# Altium PCB 8051_MOV.PcbDoc
Units mil, origin at the board's own origin, x right, y up, seen from the top; angles counter-clockwise.
Board outline 8390.03 x 3020.03 mil, 2 copper layers (Top Layer, Bottom Layer); 55 components, 98 nets, 419 pads, 0 vias.
Unrouted connection lines stored in the file: 43.
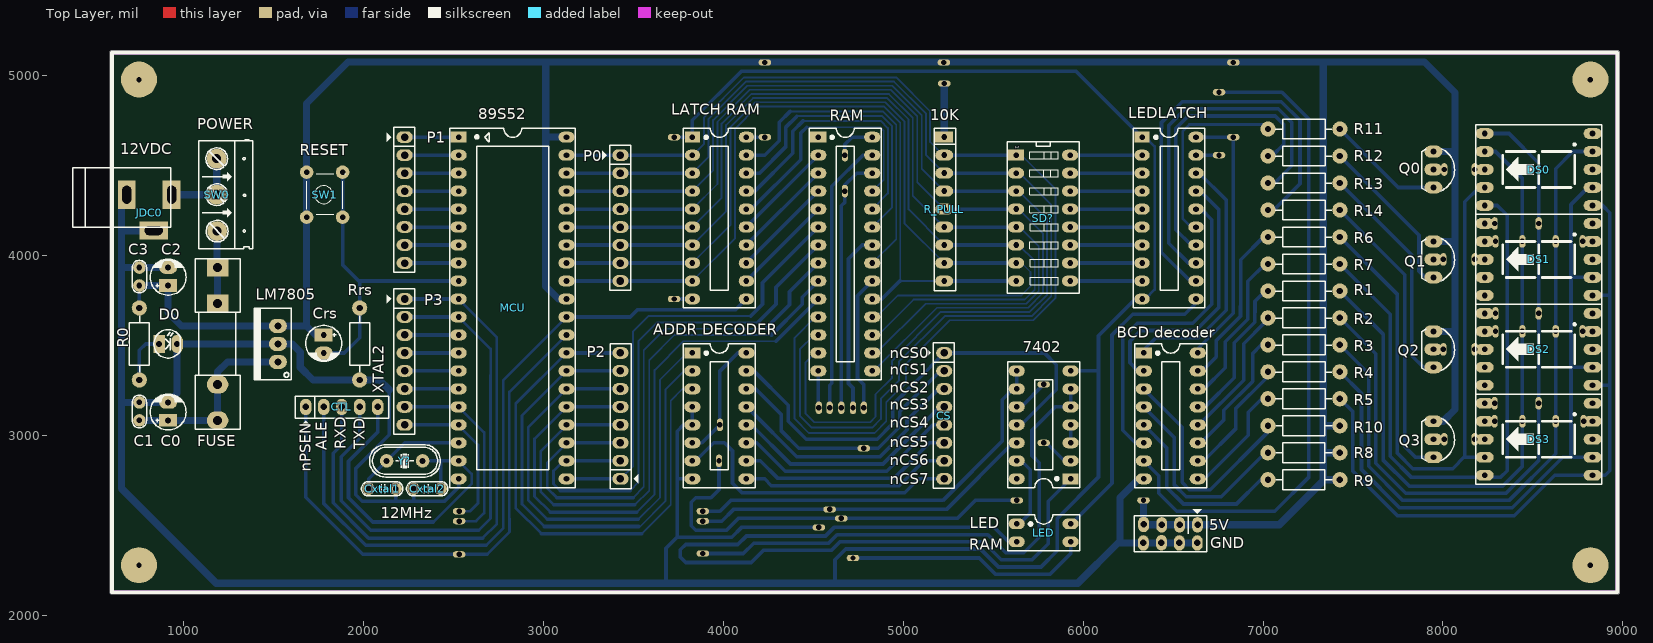
[diagram p0: Top Layer view]
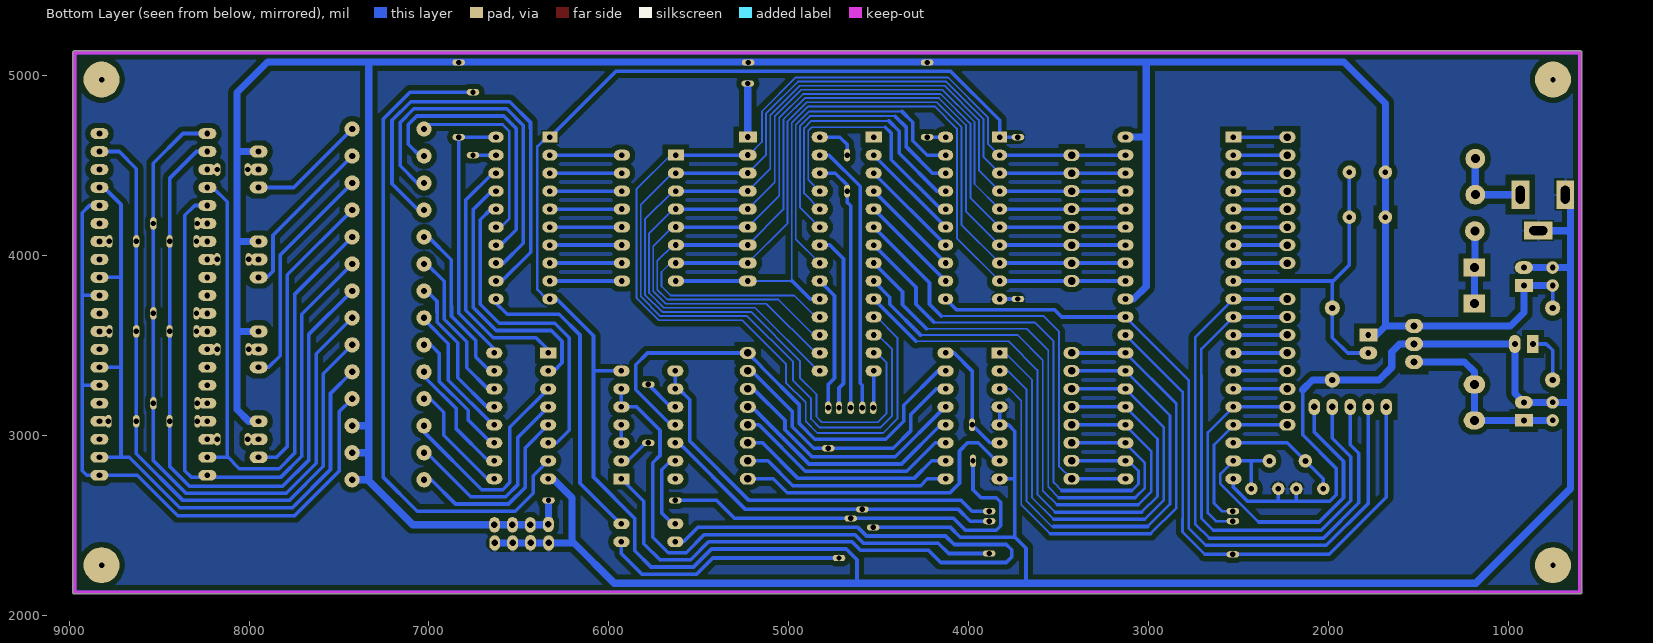
[diagram p1: Bottom Layer view, seen from below]
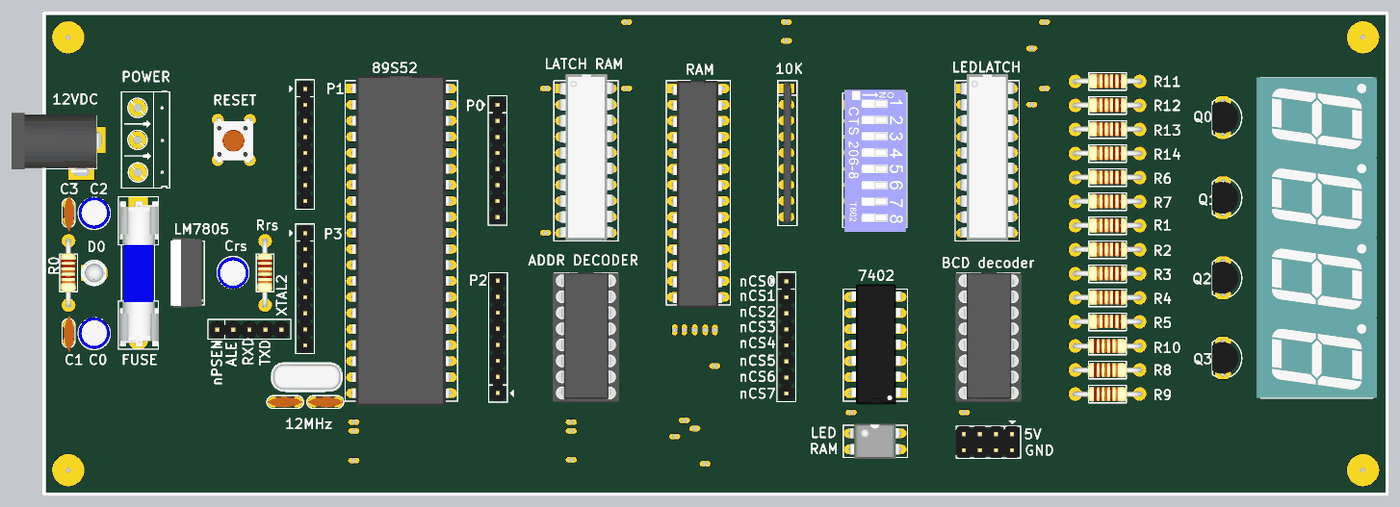
[diagram p2: 3D render of the assembled board from above, using the file's embedded part models]

## Layer stack, top to bottom
Top Solder: solder mask 0.4, Solder Resist, Dk 3.5
Top Layer: signal copper 1.4
Dielectric 1: dielectric 12.6, FR-4, Dk 4.8
Bottom Layer: signal copper 1.4
Bottom Solder: solder mask 0.4, Solder Resist, Dk 3.5

## Board outline
600,2119.99 cw(c600,2130) 589.99,2130 589.99,5130 cw(c600,5130) 600,5140.02 8970,5140.02 cw(c8970,5130) 8980.01,5130 8980.01,2130 cw(c8970,2130) 8970,2119.99

## Design rules (kind name [scope] priority, off if disabled: settings)
Clearance [All] p1: gap=13 ignorepadtopadclearanceinfootprint=FALSE except(0: Arc-Hole Track-Hole SMDPad-Hole THPad-Hole Via-Hole Fill-Hole Poly-Hole Region-Hole Text-Hole)
PolygonConnect [All] p1: connectstyle=Relief reliefconductorwidth=10 reliefentries=4 polygonreliefangle="90 Angle" airgapwidth=10
RoutingVias [All] p1: holewidth=28 width=50 viastyle="Through Hole" minholewidth=28 minwidth=50 maxholewidth=28 maxwidth=50
SolderMaskExpansion [All] p1: expansion=4
Width [All] p1: maxlimit=40 minlimit=10 preferedwidth=20
30 further rules are at their usual default settings.

## Components (designator, comment, footprint, x,y, rotation, side; value= is the part's Value field where it differs from the comment)
5V "Header 4X2" JP4x2 6485,2455 r180 top (schematic designator P10)
7402 "NORx4" DIP14/W0.3 5930,2760 r90 top
"ADDR DECODER" "74138" DIP16/W0.3 3827,3460 r270 top
"BCD decoder" "7447" DIP16/W0.3 6337,3460 r270 top
C0 "Cap Pol" CP1/2 912,3085 r90 top
C1 "Cap Non-Pol" CN1 752,3185 r270 top
C2 "Cap Pol" CP1/2 912,3835 r90 top
C3 "Cap Non-Pol" CN1 752,3935 r270 top
Crs "Cap Pol1" CP1/2 1777,3560 r270 top
CS "HEADER4" JP8 5227,3460 r270 top
CTL "HEADER5" JP5 1677,3160 r0 top
Cxtal1 "Cap" CN1.5 2177,2705 r180 top
Cxtal2 "Cap" CN1.5 2277,2705 r0 top
D0 "LED" LED-3mm 862,3510 r0 top
DS0 "7SEG S" 7SEGS 8832,4280 r90 top
DS1 "7SEG S" 7SEGS 8832,3780 r90 top
DS2 "7SEG S" 7SEGS 8832,3280 r90 top
DS3 "7SEG S" 7SEGS 8832,2780 r90 top
FUSE "Fuse" FUSE 1187,3510 r270 top
JDC0 "Jack DC" DC-IN 807,4240 r0 top
"LATCH RAM" "74HC573" DIP20/W0.3 3827,4660 r270 top
LED "SW - DIP2" DIP4/W0.3 5630,2510 r270 top (schematic designator SD)
LEDLATCH "74HC573" DIP20/W0.3 6327,4660 r270 top
LM7805 "LM7805" QTO-220 1522,3410 r90 top
MCU "AT89S52" DIP40/W0.6 2527,4660 r270 top
P0 "HEADER0" JP8 3427,4560 r270 top
P1 "HEADER1" JP8 2227,4660 r270 top
P2 "HEADER2" JP8 3427,2760 r90 top
P3 "HEADER3" JP8 2227,3760 r270 top
Q0 "A1015" QTO-92 7947,4480 r270 top
Q1 "A1015" QTO-92 7947,3980 r270 top
Q2 "A1015" QTO-92 7947,3480 r270 top
Q3 "A1015" QTO-92 7947,2980 r270 top
R0 "RESISTOR" "RES 1/2W" 752,3310 r90 top
R1 "RESISTOR" "RES 1/2W" 7027,3805 r0 top
R2 "RESISTOR" "RES 1/2W" 7027,3655 r0 top
R3 "RESISTOR" "RES 1/2W" 7027,3505 r0 top
R4 "RESISTOR" "RES 1/2W" 7027,3355 r0 top
R5 "RESISTOR" "RES 1/2W" 7027,3205 r0 top
R6 "RESISTOR" "RES 1/2W" 7027,4105 r0 top
R7 "RESISTOR" "RES 1/2W" 7027,3955 r0 top
R8 "RESISTOR" "RES 1/2W" 7427,2905 r180 top
R9 "RESISTOR" "RES 1/2W" 7427,2755 r180 top
R10 "RESISTOR" "RES 1/2W" 7427,3055 r180 top
R11 "RESISTOR" "RES 1/2W" 7027,4705 r0 top
R12 "RESISTOR" "RES 1/2W" 7027,4555 r0 top
R13 "RESISTOR" "RES 1/2W" 7027,4405 r0 top
R14 "RESISTOR" "RES 1/2W" 7027,4255 r0 top
R_PULL "10K" RN8 5227,4660 r270 top
RAM "DIP28" DIP28/W0.3 4527,4660 r270 top
Rrs "Res1" "RES 1/2W" 1977,3310 r90 top
SD? "SW - DIP8" DIP16/W0.3K 5627,4560 r270 top
SW0 "" HED3 1182,4540 r270 top
SW1 "SW" "Tact SW 4 pin" 1682,4215 r90 top
Y? "XTAL" XT2 2227,2860 r180 top

## Footprints (in the part's own frame and the unit in brackets; to place one, negate y for a bottom-side part, rotate by r counter-clockwise, add the part's x,y. Pads: shape width x height; smd on the part's side, far side on the other; paste and mask are expansions set on the pad)
7SEGS [mil] "DIP 10 Leads; Body 12 x 15 mm; Pitch 0.5 mm"
  oval 60x100 hole 32: 1(0,0) 2(100,0) 3(200,0) 4(300,0) 5(400,0) 6(400,600) 7(300,600) 8(200,600) 9(100,600) 10(0,600)
  silkscreen extent -50,-50 450,650, body extent -50,-75 450,675, height 316
CN1 [mil]
  round 70 hole 31: 1(0,0) 2(100,0)
  silkscreen extent -40,-40 141,40, body extent -60,-30 170,37, height 265
CN1.5 [mil]
  round 70 hole 31: 1(0,0) 2(150,0)
  silkscreen extent -40,-40 190,40, body extent -40,-33 190,33, height 235
CP1/2 [mil] "Tu hoa < 22uF/16>50V"
  rect 70x100 hole 32: 1(0,0)
  oval 70x100 hole 32: 2(100,0)
  silkscreen extent -53,-100 146,100, body extent -49,-99 149,99, height 287
DC-IN [mil] "Jac DC input"
  rect 100x160 hole 50 slot 100 at 90 deg: 1(125,100) 2(-125,100)
  rect 160x100 hole 50 slot 100 at 0 deg: 3(25,-100)
  silkscreen extent -425,-80 120,250, body extent -410,-105 134,269, height 434
DIP4/W0.3 [mil] "4 PIN, W 300mil, Pin to pin 100mil"
  oval 60x90 hole 31: 1(0,0) 2(100,0) 3(100,300) 4(0,300)
  silkscreen extent -50,-50 150,350, body extent -59,-10 159,305, height 170
DIP14/W0.3 [mil] "14PIN, W 300mil, Pin to pin 100mil"
  rect 60x90 hole 31: 1(0,0)
  oval 60x90 hole 31: 2(100,0) 3(200,0) 4(300,0) 5(400,0) 6(500,0) 7(600,0) 8(600,300) 9(500,300) 10(400,300) 11(300,300) 12(200,300) 13(100,300) 14(0,300)
  silkscreen extent -50,-50 650,350, body extent -70,-12 680,302, height 145
DIP16/W0.3 [mil] "16 PIN, W 300mil, Pin to pin 100mil"
  rect 60x90 hole 31: 1(0,0)
  oval 60x90 hole 31: 2(100,0) 3(200,0) 4(300,0) 5(400,0) 6(500,0) 7(600,0) 8(700,0) 9(700,300) 10(600,300) 11(500,300) 12(400,300) 13(300,300) 14(200,300) 15(100,300) 16(0,300)
  silkscreen extent -50,-50 750,350, body extent -52,-57 752,356, height 299
DIP16/W0.3K [mil] "16 PIN, W 300mil, Pin to pin 100mil For Switch"
  rect 60x90 hole 31.5: 1(0,0)
  oval 60x90 hole 31.5: 2(100,0) 3(200,0) 4(300,0) 5(400,0) 6(500,0) 7(600,0) 8(700,0) 9(700,300) 10(600,300) 11(500,300) 12(400,300) 13(300,300) 14(200,300) 15(100,300) 16(0,300)
  silkscreen extent -74,-50 767,350, body extent -93,-40 793,345, height 325
DIP20/W0.3 [mil] "DIP 20, 20 PIN, W 300mil, Pin to pin 100mil"
  rect 60x85 hole 31: 1(0,0)
  oval 60x85 hole 31: 2(100,0) 3(200,0) 4(300,0) 5(400,0) 6(500,0) 7(600,0) 8(700,0) 9(800,0) 10(900,0) 11(900,300) 12(800,300) 13(700,300) 14(600,300) 15(500,300) 16(400,300) 17(300,300) 18(200,300) 19(100,300) 20(0,300)
  silkscreen extent -50,-50 950,350, body extent -91,-18 945,322, height 155
DIP28/W0.3 [mil] "28 PIN, W 300mil, Pin to pin 100mil"
  rect 60x90 hole 31: 1(0,0)
  oval 60x90 hole 31: 2(100,0) 3(200,0) 4(300,0) 5(400,0) 6(500,0) 7(600,0) 8(700,0) 9(800,0) 10(900,0) 11(1000,0) 12(1100,0) 13(1200,0) 14(1300,0) 15(1300,300) 16(1200,300) 17(1100,300) 18(1000,300) 19(900,300) 20(800,300) 21(700,300) 22(600,300) 23(500,300) 24(400,300) 25(300,300) 26(200,300) 27(100,300) 28(0,300)
  silkscreen extent -50,-50 1350,350, body extent -50,-10 1367,300, height 200
DIP40/W0.6 [mil] "40 PIN, W 600mil, Pin to pin 100mil"
  rect 60x90 hole 31: 1(0,0)
  oval 60x90 hole 31: 2(100,0) 3(200,0) 4(300,0) 5(400,0) 6(500,0) 7(600,0) 8(700,0) 9(800,0) 10(900,0) 11(1000,0) 12(1100,0) 13(1200,0) 14(1300,0) 15(1400,0) 16(1500,0) 17(1600,0) 18(1700,0) 19(1800,0) 20(1900,0) 21(1900,600) 22(1800,600) 23(1700,600) 24(1600,600) 25(1500,600) 26(1400,600) 27(1300,600) 28(1200,600) 29(1100,600) 30(1000,600) 31(900,600) 32(800,600) 33(700,600) 34(600,600) 35(500,600) 36(400,600) 37(300,600) 38(200,600) 39(100,600) 40(0,600)
  silkscreen extent -50,-50 1950,650, body extent -82,-10 1982,600, height 224
FUSE [mil] "De Fuse"
  rect 100x120 hole 50: 1(-425,0) 1(-225,0)
  oval 100x120 hole 50: 2(225,0) 2(425,0)
  silkscreen extent -475,-125 475,125, body extent -448,-117 459,127, height 378
HED3 [mil] "Header 3, 3 pin, hight 300mil, Pin to Pin 200, Colour Green"
  round 110 hole 50: 1(0,0) 2(200,0) 3(402.62,2.62)
  silkscreen extent -106,-100 500,200
JP4x2 [mil] "Connector 4x2"
  oval 60x86 hole 36: 1(-150.5,-49.5) 2(-50.5,-49.5) 3(48.5,-49.5) 4(149.5,-51.5) 5(-149.5,51.5) 6(-49.5,51.5) 7(50,50) 8(150.5,51.5)
  silkscreen extent -200,-135 200,101, body extent -197,-100 203,100, height 335
JP5 [mil] "JP5"
  oval 65x90 hole 36: 1(0,0) 2(100,0) 3(200,0) 4(300,0) 5(400,0)
  silkscreen extent -57,-101 461,60, body extent -48,-53 448,45, height 323
JP8 [mil] "JP8"
  oval 65x90 hole 42: 1(0,0) 2(100,0) 3(200,0) 4(300,0) 5(400,0) 6(500,0) 7(600,0) 8(700,0)
  silkscreen extent -56,-100 752,57, body extent -48,-50 748,48, height 323
LED-3mm [mil] "LED 2 PIN, 3ly Only colour"
  rect 65x100 hole 32: 1(0,0)
  oval 65x100 hole 32: 2(100,0)
  silkscreen extent -29,-78 118,79, body extent -25,-75 113,75, height 217
QTO-92 [mil] "TO-92"
  oval 66x100 hole 32: 1(-100,0) 2(0,0) 3(100,0)
  silkscreen extent -117,-65 120,118, body extent -109,-66 109,95, height 245
QTO-220 [mil] "TO-220 - 1-2-3"
  oval 80x100 hole 39: 1(0,0) 2(100,0) 3(200,0)
  silkscreen extent -100,-76 300,130, body extent -119,-64 322,121, height 755
"RES 1/2W" [mil] "R 1/2W, 2 pin, 300mil"
  round 85 hole 35: 1(0,0) 2(400,0)
  silkscreen extent 42,-55 356,55, body extent -12,-45 414,49, height 91
RN8 [mil] "R SIP8, 9 Pin"
  rect 60x100 hole 32: 1(0,0)
  oval 60x100 hole 32: 2(100,0) 3(200,0) 4(300,0) 5(400,0) 6(500,0) 7(600,0) 8(700,0) 9(800,0)
  silkscreen extent -50,-55 855,65, body extent -43,-20 843,29, height 219
"Tact SW 4 pin" [mil] "SW button 4pin, 250 x250 mil"
  round 75 hole 31: 1(0,0) 2(250,-200) 3(250,0) 4(0,-200)
  silkscreen extent 15,-215 240,0, body extent -36,-220 276,24, height 276
XT2 [mil] "Footpin for Crystal 2 pin"
  round 75 hole 34: 1(-100,0) 2(100,0)
  silkscreen extent -198,-90 195,90, body extent -233,-93 213,90, height 138

## Part data
5V: "Header, 4-Pin, Dual row"
7402: library part DIP14, "DIP14"
"ADDR DECODER": "3 -to- 8 Decoder - Out Low"
"BCD decoder": "BCD to 7-Segment Decoder/Driver"
C0 C2 Crs: "Polarized Capacitor (Radial)"
C1 C3 Cxtal1 Cxtal2: "Capacitor"
CS: library part MHDR1X8, "Header, 8-Pin"
CTL: library part "Header 5H", "Header, 5-Pin, Right Angle"
DS0 DS1 DS2 DS3: library part LED7S, "Single 7 Seg Dipslay"
JDC0: "Jack DC input"
"LATCH RAM" LEDLATCH: library part 74573, "Octal D-Type Latch with 3-State Output Non-Inverting"
LED: library part SWDIP-2, "DIP Switch, 2 Position, SPST"
LM7805: "Positive Voltage Regulator"
MCU: "AT89S52, 8k Byte Flash Memory , 40 Pin"
P0 P1 P2 P3: library part "Header 8", "Header, 8-Pin"
Q0 Q1 Q2 Q3: "PNP Bipolar Transistor"
R0 R1 R2 R3 R4 R5 R6 R7 R8 R9 R10 R11 R12 R13 R14 Rrs: "Resistor"
R_PULL: library part RKC8LD, "Resistor Pack 4x2"
SD?: library part SWDIP-8, "DIP Switch, 8 Position, SPST"
SW0: library part Hed3, "Header 3 (Green)"
SW1: library part "Tact SW - 4Pin", "Switch button 4 pin"
Y?: "Crystal Oscillator"

## Free pads (board coordinates)
  oval 35x70 hole 30: 2(8177,2980) 3(8007,2980) 4(8177,3480) 5(8002,3480) 6(8177,3980) 7(8002,3980) 8(8777,4080) 10(8777,3580) 12(8782,3080) 14(8287,4180) 16(8292,4080) 20(8532,4180) 21(8442,4080) 24(8627,4080) 25(8627,3580) 26(8627,3080) 27(8292,3680) 28(8532,3680) 29(8292,3580) 30(8442,3580) 31(8287,3180) 32(8532,3180) 33(8287,3080) 34(8442,3080) 35(8007,4480) 36(8177,4480) 48(4675,4560) 49(4675,4360) 50(4530,3155) 51(4590,3155) 52(4655,3155) 53(4720,3155) 54(4780,3155) 65(3975,2860) 66(3980,3060)
  oval 70x35 hole 30: 39(2530,2580) 40(2530,2525) 41(2530,2340) 42(6755,4560) 43(6755,4910) 44(6834.5,4660) 45(6835,5075) 46(4230,4660) 47(4230,5075) 55(4780,2930) 56(3885,2580) 57(3885,2525) 58(3885,2345) 59(4590,2590) 60(5780,3285) 61(5780,2960) 62(4655,2540) 63(4720,2320) 64(4530,2490) 67(3725,4660) 68(3725,3760) 69(5227,4958) 70(5225,5075) 75(5630,2640) 76(6335,2640)
  round 200 hole 30: 71(8820,4980) 72(8820,2280) 73(750,2280) 74(750,4980)

## Nets (pads, with @x,y where several pads share a name; then routed paths per layer and width w, separated by ;. In a path a pad name is that pad's centre, name@x,y a point inside that pad or via, vN(x,y) a via of type N, cw(c..) or ccw(c..) an arc to the next point about the centre after c; other vN are vias at no path point)
5V: 5V.1 5V.2 5V.3 5V.4 7402.14 "ADDR DECODER.6" "ADDR DECODER.16" "BCD decoder.16" "LATCH RAM.20" C2.1 C3.2 Crs.1 LEDLATCH.20 LM7805.3 MCU.31 MCU.40 pad.44 pad.45 pad.46 pad.47 pad.48 pad.49 pad.52 pad.62 pad.65 pad.66 pad.69 pad.70 pad.75 pad.76 Q0.1 Q1.1 Q2.1 Q3.1 R0.2 R8.1 R9.1 R10.1 R_PULL.1 RAM.26 RAM.28 SW1.1 SW1.3 | length 23297.1
  Bottom Layer w20: R0.2 C3.2 ; 3827,2960 3880,2960 pad.66 3980,3360 4080,3460 4127,3460 ; pad.65@3975,2855 3975,2700 3930,2655 3845,2655 3820,2630 3820,2500 3845,2475 4016.57,2475 4081.57,2540 pad.62 ; 4127,4660 pad.46 ; pad.52@4655,3150.43 pad.52 4655,4278 4675,4298 pad.49 ; pad.62@4665,2540 5300,2540 5400,2640 pad.75 ; pad.49@4675,4375 4675,4395 4740,4460 RAM.26 ; pad.48 4675,4620 4715,4660 RAM.28 ; LEDLATCH.20 pad.44 6834.5,3680.77 6637,3483.27 6637,3460
  Bottom Layer w40: C3.2 C2.1 912,3685 987,3610 LM7805.3 1682,3610 ; Crs.1 1769.5,3552.5 1739.5,3552.5 1682,3610 ; 3012,5075 3012,4660 ; MCU.31 3082,3760 3012,3830 3012,4660 ; MCU.40 3012,4660 ; R_PULL.1 pad.69 ; pad.76 6335,2507 5V.4 6337.5,2504.5 5V.3 5V.2 5V.1 7089.5,2504.5 7335,2750 7335,2905 ; 7340,2755 R9.1 ; 7340,3055 R10.1 ; R8.1 7335,2905 ; Q3.1 8002,3080 8067,3145 8067,3580 ; Q2.1 8067,3580 ; Q1.1 8062,4080 ; Q0.1 8055,4580 ; 1682,3610 SW1.1 SW1.3 1682,4847 1912,5077 7335,5077 ; 7335,2905 7335,5077 ; 7335,5077 7898,5077 8067,4908 8067,3580
A: DS0.7 DS1.7 DS2.7 DS3.7 pad.16 pad.21 pad.29 pad.30 pad.33 pad.34 R1.2 | length 3792.2
  Bottom Layer w20: R1.2 7667,3565 7667,2865 7812,2720 8332,2720 8442,2830 pad.34 pad.30 pad.21 8442,4430 8292,4580 DS0.7
A8: MCU.21 P2.1 RAM.6 | length 2489.5
  Bottom Layer w10: P2.1 3497,2830 3497,3580 3582,3665 4152,3665
  Bottom Layer w20: MCU.21 P2.1 ; 4152,3665 4217,3730 4217,3850 RAM.6
A9: MCU.22 P2.2 RAM.7 | length 3036.4
  Bottom Layer w10: 3482,2695 3527,2740 3527,3525 3632,3630 4192,3630
  Bottom Layer w15: 3092,2695 3054.5,2732.5 3054.5,2804.5 3110,2860 MCU.22
  Bottom Layer w20: 3092,2695 3482,2695 ; MCU.22 P2.2 ; 4192,3630 4292,3730 4292,3825 RAM.7
A10: MCU.23 P2.3 RAM.8 | length 3146.5
  Bottom Layer w10: 3497,2655 3557,2715 3557,3475 3677,3595 4227,3595
  Bottom Layer w15: 3073.57,2655 3019.5,2709.07 3019.5,2848.82 3127,2956.32 MCU.23
  Bottom Layer w20: 3073.57,2655 3497,2655 ; MCU.23 P2.3 ; 4233.57,3595 4367,3728.43 4367,3800 RAM.8
A11: MCU.24 P2.4 RAM.9 | length 3267.9
  Bottom Layer w10: 3507,2615 3587,2695 3587,3420 3727,3560 4267,3560
  Bottom Layer w15: 3057,2615 2984.5,2687.5 2984.5,2913.82 3127,3056.32 MCU.24
  Bottom Layer w20: 3057,2615 3507,2615 ; MCU.24 P2.4 ; 4267,3560 4437,3730 4437,3770 RAM.9
A12: MCU.25 P2.5 RAM.10 | length 3394.8
  Bottom Layer w10: 3517,2575 3617,2675 3617,3365 3777,3525 4292,3525 ; RAM.10@4512,3760 RAM.10
  Bottom Layer w15: 3037,2575 2949.5,2662.5 2949.5,2982.5 MCU.25
  Bottom Layer w20: 3037,2575 3517,2575 ; MCU.25 P2.5 ; 4292,3525 RAM.10
A13: "ADDR DECODER.1" MCU.26 P2.6 | length 2730.2
  Bottom Layer w10: 3526.5,2535 3647,2655.5 3647,3310 3797,3460 3827,3460
  Bottom Layer w15: 3020.14,2535 2914.5,2640.64 2914.5,3047.5 MCU.26
  Bottom Layer w20: 3020.14,2535 3526.5,2535 ; MCU.26 P2.6
A14: "ADDR DECODER.2" MCU.27 P2.7 | length 2863.8
  Bottom Layer w10: 3528.92,2495 3537,2495 3677,2635 3677,3255 3782,3360 3827,3360
  Bottom Layer w15: 3003.57,2495 2879.5,2619.07 2879.5,3112.5 MCU.27
  Bottom Layer w20: 3003.57,2495 3528.92,2495 ; MCU.27 P2.7
A15: "ADDR DECODER.3" MCU.28 P2.8 | length 2994.2
  Bottom Layer w10: 3543.42,2460 3552,2460 3707,2615 3707,3195 3772,3260 3827,3260
  Bottom Layer w15: 2987,2455 2844.5,2597.5 2844.5,3177.5 MCU.28
  Bottom Layer w20: 2987,2455 3545.49,2455 ; MCU.28 P2.8
AD0: "LATCH RAM.2" LEDLATCH.2 MCU.39 P0.1 R_PULL.2 RAM.11 SD?.1 SD?.16 | length 6892.5
  Bottom Layer w10: 3827,4560 3827.78,4560 3892,4624.22 3892,4770 4114,4992 4960,4992 5148,4804 5148,4633.54 5221.54,4560 R_PULL.2 ; RAM.11 4510,3660 4395,3545 4395,3095 4475,3015 4839.85,3015 4905,3080.15 4905,3185.15 5015,3295.15 5015,3400 5257,3642 5722.16,3642 5845,3764.84 5845,4372 5657,4560 SD?.1
  Bottom Layer w20: MCU.39 P0.1 3827,4560 ; R_PULL.2 SD?.1 ; SD?.16 LEDLATCH.2
AD1: "LATCH RAM.3" LEDLATCH.3 MCU.38 P0.2 R_PULL.3 RAM.12 SD?.2 SD?.15 | length 6717.5
  Bottom Layer w10: 3827,4460 3917,4550 3917,4762.47 4123.53,4969 4948,4969 5125,4792 5125,4562 R_PULL.3 ; RAM.12 4505,3560 4425,3480 4425,3110 4490,3045 4827.43,3045 4875,3092.57 4875,3205 4975,3305 4975,3410 5230,3665 5712.63,3665 5822,3774.37 5822,4285 5647,4460 SD?.2
  Bottom Layer w20: MCU.38 P0.2 3827,4460 ; R_PULL.3 SD?.2 ; SD?.15 LEDLATCH.3
AD2: "LATCH RAM.4" LEDLATCH.4 MCU.37 P0.3 R_PULL.4 RAM.13 SD?.3 SD?.14 | length 6541.8
  Bottom Layer w10: 3827,4360 3942,4475 3942,4754.95 4133.05,4946 4938.47,4946 5102,4782.47 5102,4485 R_PULL.4 ; RAM.13 4510,3460 4455,3405 4455,3125 4505,3075 4815,3075 4845,3105 4845,3230 4937,3322 4937,3417 5208,3688 5703.11,3688 5799,3783.89 5799,4203 5642,4360 SD?.3
  Bottom Layer w20: MCU.37 P0.3 3827,4360 ; R_PULL.4 SD?.3 ; SD?.14 LEDLATCH.4
AD3: "LATCH RAM.5" LEDLATCH.5 MCU.36 P0.4 R_PULL.5 RAM.15 SD?.4 SD?.13 | length 5530.7
  Bottom Layer w10: 3827,4260 3966.5,4399.5 3966.5,4744.5 4145,4923 4928.95,4923 5077,4774.95 5077,4410 R_PULL.5 ; RAM.15 4836,3360 5187,3711 5693.58,3711 5776,3793.42 5776,4126 5642,4260 SD?.4
  Bottom Layer w20: MCU.36 P0.4 3827,4260 ; R_PULL.5 SD?.4 ; SD?.13 LEDLATCH.5
AD4: "LATCH RAM.6" LEDLATCH.6 MCU.35 P0.5 R_PULL.6 RAM.16 SD?.5 SD?.12 | length 5497
  Bottom Layer w10: 3827,4160 3989.5,4322.5 3989.5,4734.97 4154.53,4900 4919.42,4900 5052,4767.42 5052,4335 R_PULL.6 ; RAM.16 4850,3460 5124,3734 5684.05,3734 5753,3802.95 5753,4054 5647,4160 SD?.5
  Bottom Layer w20: MCU.35 P0.5 3827,4160 ; R_PULL.6 SD?.5 ; SD?.12 LEDLATCH.6
AD5: "LATCH RAM.7" LEDLATCH.7 MCU.34 P0.6 R_PULL.7 RAM.17 SD?.6 SD?.11 | length 5457.4
  Bottom Layer w10: 3827,4060 4014.5,4247.5 4014.5,4727.45 4164.05,4877 4909.89,4877 5029,4757.89 5029,4258 R_PULL.7 ; RAM.17 4860,3560 5057,3757 5674.53,3757 5730,3812.47 5730,3972 5642,4060 SD?.6
  Bottom Layer w20: MCU.34 P0.6 3827,4060 ; R_PULL.7 SD?.6 ; SD?.11 LEDLATCH.7
AD6: "LATCH RAM.8" LEDLATCH.8 MCU.33 P0.7 R_PULL.8 RAM.18 SD?.7 SD?.10 | length 5423.3
  Bottom Layer w10: 3827,3960 4039.5,4172.5 4039.5,4717.5 4176,4854 4900.37,4854 5006,4748.37 5006,4181 R_PULL.8 ; RAM.18 4850,3660 4970,3780 5657,3780 5707,3830 5707,3910 5657,3960 SD?.7
  Bottom Layer w20: MCU.33 P0.7 3827,3960 ; R_PULL.8 SD?.7 ; SD?.10 LEDLATCH.8
AD7: "LATCH RAM.9" LEDLATCH.9 MCU.32 P0.8 R_PULL.9 RAM.19 SD?.8 SD?.9 | length 4774
  Bottom Layer w10: 3827,3860 4064.5,4097.5 4064.5,4707.5 4188,4831 4890.84,4831 4983,4738.84 4983,3860 R_PULL.9
  Bottom Layer w20: MCU.32 P0.8 3827,3860 ; RAM.19 4880,3760 4980,3860 4983,3860 ; R_PULL.9 SD?.8 ; SD?.9 LEDLATCH.9
AD_0: "LATCH RAM.19" RAM.21 | length 1844.9
  Bottom Layer w10: 4374,4803 4886.31,4803 4960,4729.31 4960,4093 RAM.21
  Bottom Layer w20: 4127,4560 4230,4560 4310,4640 4310,4743 4370,4803
AD_1: "LATCH RAM.18" RAM.23 | length 1634.4
  Bottom Layer w10: 4407,4775 4410,4778 4878.78,4778 4937,4719.78 4937,4270 RAM.23
  Bottom Layer w20: 4127,4460 4200,4460 4345,4605 4345,4713 4407,4775
AD_2: "LATCH RAM.17" RAM.24 | length 1523.4
  Bottom Layer w10: 4127,4360 4175,4360 ; 4442,4750 4874.26,4750 4914,4710.26 4914,4347 RAM.24
  Bottom Layer w20: 4175,4360 4385,4570 4385,4693 4442,4750
AD_3: "LATCH RAM.16" RAM.25 | length 1409.5
  Bottom Layer w10: 4127,4260 4155,4260 ; 4462,4715 4872,4715 4891,4696 4891,4424 RAM.25
  Bottom Layer w20: 4155,4260 4430,4535 4430,4683 4462,4715
AD_4: "LATCH RAM.15" RAM.2 | length 577.8
  Bottom Layer w10: 4127,4160 4133.07,4160 ; RAM.2@4527,4553.93 RAM.2
  Bottom Layer w20: 4127,4160 RAM.2
AD_5: "LATCH RAM.14" RAM.3 | length 565.7
  Bottom Layer w20: 4127,4060 RAM.3
AD_6: "LATCH RAM.13" RAM.4 | length 585.4
  Bottom Layer w10: 4127,3960 4127,3970 ; RAM.4@4517.28,4360 RAM.4
  Bottom Layer w20: 4127,3960 RAM.4
AD_7: "LATCH RAM.12" RAM.5 | length 565.7
  Bottom Layer w20: 4127,3860 RAM.5
ALE: "LATCH RAM.11" CTL.2 MCU.30 | length 4033.5
  Bottom Layer w15: 2680,2390 2775,2485 2775,2524.5 2774.5,2525 2774.5,3307.5 MCU.30
  Bottom Layer w20: CTL.2 1777,2623 2010,2390 2680,2390 ; MCU.30 3482,3660 3522,3700 4067,3700 4127,3760
B: DS0.6 DS1.6 DS2.6 DS3.6 pad.14 pad.20 pad.27 pad.28 pad.31 pad.32 R2.2 | length 3962.3
  Bottom Layer w20: R2.2 7627,3455 7627,2846.57 7793.57,2680 8350.43,2680 8532,2861.57 pad.32 pad.28 pad.20 8532,4515 8367,4680 DS0.6
BCD0: "BCD decoder.7" LEDLATCH.19 pad.42 pad.43 | length 3849.5
  Bottom Layer w20: 6337,2860 6420,2777 6420,2680 6520,2580 7065,2580 7255,2770 7255,4759.71 7104.71,4910 pad.43 ; LEDLATCH.19 pad.42
BCD1: "BCD decoder.1" LEDLATCH.18 | length 1408.4
  Bottom Layer w20: 6337,3460 6337,3477 6405,3545 6642.16,3545 6794.5,3697.34 6794.5,4310.5 6645,4460 LEDLATCH.18
BCD2: "BCD decoder.2" LEDLATCH.17 | length 1500.8
  Bottom Layer w20: 6337,3360 6305,3360 6260,3405 6260,3525 6320,3585 6625.59,3585 6754.5,3713.91 6754.5,4255.5 6650,4360 LEDLATCH.17
BCD3: "BCD decoder.6" LEDLATCH.16 | length 1814.5
  Bottom Layer w20: 6337,2960 6290,2960 6220,3030 6220,3545 6300,3625 6609.02,3625 6714.5,3730.48 6714.5,4200.5 6655,4260 LEDLATCH.16
C: DS0.4 DS1.4 DS2.4 DS3.4 pad.8 pad.10 pad.12 pad.24 pad.25 pad.26 R3.2 | length 3797
  Bottom Layer w20: R3.2 7587,3345 7587,2830 7777,2640 8367,2640 8627,2900 pad.26 pad.25 pad.24 8627,4485 8722,4580 DS0.4
D: DS0.2 DS1.2 DS2.2 DS3.2 R4.2 | length 3881.1
  Bottom Layer w20: R4.2 7547,3235 7547,2811.57 7758.57,2600 8385.43,2600 8665.43,2880 8712,2880 ; 8717,3880 DS1.2 ; DS3.2 8712,2880 ; DS2.2 8712,3380 ; DS0.2 8807,4380 8712,4285 8712,3380 ; 8712,2880 8712,3380
E: DS0.1 DS1.1 DS2.1 DS3.1 R5.2 | length 3797.7
  Bottom Layer w20: R5.2 7499.5,3132.5 7499.5,2802.5 7747,2555 8397,2555 8622,2780 DS3.1 8902,2780 8927,2805 8927,3780 ; DS2.1 8922,3280 ; DS1.1 8927,3780 ; DS0.1 8887,4280 8927,4240 8927,3780
F: DS0.9 DS1.9 DS2.9 DS3.9 R6.2 | length 3442.3
  Bottom Layer w20: R6.2 7747,3785 7747,2901.57 7831.57,2817 8054,2817 8122,2885 8122,4300 8202,4380 DS0.9 ; 8122,2880 DS3.9
G: DS0.10 DS1.10 DS2.10 DS3.10 R7.2 | length 3474.2
  Bottom Layer w20: R7.2 7707,3675 7707,2885 7822,2770 8222,2770 DS3.10 8242,2770 8322,2770 8357,2805 8357,4225 8302,4280 DS0.10
GND: 5V.5 5V.6 5V.7 5V.8 7402.7 "ADDR DECODER.4" "ADDR DECODER.5" "ADDR DECODER.8" "BCD decoder.8" "LATCH RAM.1" "LATCH RAM.10" C0.2 C1.1 C2.2 C3.1 Cxtal1.1 Cxtal2.1 D0.2 JDC0.2 JDC0.3 LEDLATCH.1 LEDLATCH.10 LM7805.2 MCU.20 pad.50 pad.64 pad.67 pad.68 RAM.14 Rrs.1 | length 22305.2
  Bottom Layer w15: LEDLATCH.10 6345,3760 6397,3812 6397,4608 6345,4660 LEDLATCH.1
  Bottom Layer w20: 2142,3255 2142,3005 1955,2818 1955,2671.27 1991.27,2635 2448.92,2635 2527,2713.08 MCU.20 ; 2177,2637 Cxtal1.1 ; 2277,2637 Cxtal2.1 ; 3680,2180 3680,2375 3742,2437 3742,3025 3777,3060 3827,3060 3827,3160 ; pad.68 3827,3760 ; pad.67 3827,4660 3827,4754.5 4099.5,5027 5960,5027 LEDLATCH.1 ; 3742,2435 4045,2435 4100,2490 pad.64 ; 3747,2760 3827,2760 ; 3820,2185 4495,2185 ; RAM.14 4527,3158 pad.50 ; 4620,2185 4620,2310 4680,2370 5428.43,2370 5528.43,2270 5765,2270 5855,2360 5855,2540 6085,2770 6085,3555 6290,3760 LEDLATCH.10 ; 7402.7 6075,3360
  Bottom Layer w40: 657,3185 C1.1 C0.2 962,3235 D0.2 LM7805.2 1602,3510 1647,3465 1647,3380 1717,3310 Rrs.1 2087,3310 2142,3255 ; 657,3935 C3.1 C2.2 ; 657,4140 JDC0.3 ; JDC0.2 652,4310 652,2708 1180,2180 3405,2180 3410,2180 3680,2180 5970,2180 6193.5,2403.5 6205,2403.5 ; 6337,2760 6310,2760 6205,2655 6205,2403.5 ; 5V.5 5V.6 5V.8 6205,2403.5
LED0: LEDLATCH.15 R11.1 | length 1079.6
  Bottom Layer w15: LEDLATCH.15 6600,4160 6552.5,4207.5 6552.5,4692.5 6590,4730 7002,4730 R11.1
LED1: LEDLATCH.14 R12.1 | length 1583.6
  Bottom Layer w20: LEDLATCH.14 6600,4060 6515,4145 6515,4708.03 6584.47,4777.5 7067.5,4777.5 7115,4730 7115,4620 7050,4555 R12.1
LED2: LEDLATCH.13 R13.1 | length 2021
  Bottom Layer w20: LEDLATCH.13 6585,3960 6475,4070 6475,4724.6 6567.9,4817.5 7084.07,4817.5 7160,4741.57 7160,4500 7065,4405 R13.1
LED3: LEDLATCH.12 R14.1 | length 2432.5
  Bottom Layer w20: LEDLATCH.12 6595,3860 6434.5,4020.5 6434.5,4710 6435,4710.5 6435,4741.17 6551.33,4857.5 7100.64,4857.5 7205,4753.14 7205,4400 7060,4255 R14.1
LED_LE: 7402.13 LED.1 | length 429.4
  Bottom Layer w20: LED.1@5630,2525 5660,2525 5705,2570 5705,2810 5655,2860 7402.13
LED_LE1: LED.4 LEDLATCH.11 | length 1711.5
  Bottom Layer w20: LED.4 5935,2510 6160,2735 6160,3560 6275,3675 6565,3675 6627,3737 LEDLATCH.11
NCS0: 7402.11 "ADDR DECODER.15" CS.1 | length 2663
  Bottom Layer w20: 4127,3360 4170,3360 4360,3170 4360,3080 4460,2980 4854.35,2980 4940,3065.65 4940,3170.65 5152,3382.65 5152,3385.89 5188.61,3422.5 5189.5,3422.5 CS.1 5785,3460 5850,3395 5850,3255 5655,3060 7402.11
NCS1: "ADDR DECODER.14" CS.2 pad.54 pad.55 RAM.20 | length 2271.9
  Bottom Layer w20: 4127,3260 4180,3260 4320,3120 4320,3029.08 4419.08,2930 4860.92,2930 4980,3049.08 4980,3135 5205,3360 CS.2 ; pad.54 4780,3285 4745,3320 4745,3778 RAM.20
NCS2: "ADDR DECODER.13" CS.3 | length 1437.1
  Bottom Layer w20: 4127,3160 4165,3160 4147.5,3142.5 4407.5,2882.5 4869.99,2882.5 5020,3032.51 5020,3085 5195,3260 CS.3
NCS3: "ADDR DECODER.12" CS.4 | length 1321.6
  Bottom Layer w20: 4127,3060 4155,3060 4372.5,2842.5 4886.56,2842.5 5204.06,3160 CS.4
NCS4: "ADDR DECODER.11" CS.5 | length 1271.9
  Bottom Layer w20: 4127,2960 4185,2960 4342.5,2802.5 4907.5,2802.5 5165,3060 CS.5
NCS5: "ADDR DECODER.10" CS.6 | length 1222.2
  Bottom Layer w20: 4127,2860 4205,2860 4302.5,2762.5 4947.5,2762.5 5145,2960 CS.6
NCS6: "ADDR DECODER.9" CS.7 | length 1172.5
  Bottom Layer w20: 4127,2760 4228.73,2760 4266.23,2722.5 4977.5,2722.5 5115,2860 CS.7
NCS7: "ADDR DECODER.7" CS.8 | length 1693.9
  Bottom Layer w20: 3827,2860 3845,2860 3945,2960 4005,2960 4050,2915 4050,2735 4102.5,2682.5 5007.5,2682.5 5085,2760 CS.8
"NetBCD decoder_3": "BCD decoder.3" R10.2 | length 1269.3
  Bottom Layer w20: 6337,3260 6550,3047 6550,2740.14 6590.14,2700 6707,2700 7027,3020 R10.2
"NetBCD decoder_4": "BCD decoder.4" R8.2 | length 1152.9
  Bottom Layer w20: 6337,3160 6505,2992 6505,2728.57 6573.57,2660 6767,2660 7012,2905 R8.2
"NetBCD decoder_5": "BCD decoder.5" R9.2 | length 1057
  Bottom Layer w20: 6337,3060 6465,2932 6465,2712 6557,2620 6852,2620 6987,2755 R9.2
"NetBCD decoder_9": "BCD decoder.9" R5.1 | length 649.3
  Bottom Layer w20: 6637,2760 6675,2760 6917,3002 6917,3130 6992,3205 R5.1
"NetBCD decoder_10": "BCD decoder.10" R4.1 | length 643.3
  Bottom Layer w20: 6637,2860 6670,2860 6847,3037 6847,3150 7014.35,3317.35 R4.1@7014.35,3327.65
"NetBCD decoder_11": "BCD decoder.11" R3.1 | length 738.8
  Bottom Layer w20: 6637,2960 6655,2960 6782,3087 6782,3141.57 6942,3301.57 6942,3457 6990,3505 R3.1
"NetBCD decoder_12": "BCD decoder.12" R2.1 | length 772.3
  Bottom Layer w20: 6637,3060 6643.86,3060 6892,3308.14 6892,3512 7007,3627 7007,3655 R2.1
"NetBCD decoder_13": "BCD decoder.13" R1.1 | length 838.8
  Bottom Layer w20: 6637,3160 6677,3160 6840,3323 6840,3516.57 6954.5,3631.07 6954.5,3685.03 6955,3685.53 6955,3748 7012,3805 R1.1
"NetBCD decoder_14": "BCD decoder.14" R7.1 | length 885.8
  Bottom Layer w20: 6637,3260 6672,3260 6790,3378 6790,3523.14 6914.5,3647.64 6914.5,3701.6 6915,3702.1 6915,3858 7012,3955 R7.1
"NetBCD decoder_15": "BCD decoder.15" R6.1 | length 935.8
  Bottom Layer w20: 6637,3360 6662,3360 6740,3438 6740,3529.71 6874.5,3664.21 6874.5,3718.17 6875,3718.67 6875,3978 7002,4105 R6.1
NetC0_1: C0.1 C1.2 FUSE.2 LM7805.1 | length 1062.8
  Bottom Layer w40: C1.2 C0.1 1187,3085 1187,3285 1187,3355 1242,3410 LM7805.1
NetD0_1: D0.1 R0.1 | length 289.5
  Bottom Layer w20: R0.1 752,3475 787,3510 D0.1
NetDS0_8: DS0.8 pad.35 pad.36 Q0.2
NetDS1_8: DS1.8 pad.6 pad.7 Q1.2
NetDS2_8: DS2.8 pad.4 pad.5 Q2.2
NetDS3_8: DS3.8 pad.2 pad.3 Q3.2
NetFUSE_1: FUSE.1 SW0.3 | length 400
  Bottom Layer w40: FUSE.1@1184.62,3937.38 SW0.3 ; FUSE.1@1187,3735 FUSE.1@1187,3935
NetJDC0_1: JDC0.1 SW0.1 SW0.2 | length 450
  Bottom Layer w40: JDC0.1 SW0.2 SW0.1
NetQ0_3: Q0.3 R11.2 | length 654.6
  Bottom Layer w20: R11.2 7752,4380 Q0.3
NetQ1_3: Q1.3 R12.2 | length 916.8
  Bottom Layer w20: R12.2 7867,4115 7867,3915 7902,3880 Q1.3
NetQ2_3: Q2.3 R13.2 | length 1272.6
  Bottom Layer w20: R13.2 7827,4005 7827,3445 7892,3380 Q2.3
NetQ3_3: Q3.3 R14.2 | length 1649
  Bottom Layer w20: R14.2 7787,3895 7787,2940 7847,2880 Q3.3
NPSEN: 7402.5 7402.6 CTL.1 MCU.29 pad.41 pad.58 | length 6015.8
  Bottom Layer w15: 2685,2340 2810,2465 2810,2538.99 2809.5,2539.49 2809.5,3242.5 MCU.29
  Bottom Layer w20: CTL.1 1677,2658 1995,2340 pad.41 2685,2340 ; pad.58 4110,2345 4167.5,2402.5 4583.74,2402.5 4631.24,2450 5470,2450 5570,2350 5670,2350 5755,2435 5755,2850 5715,2890 5715,3030 5845,3160 7402.5 7402.6
NRD: 7402.8 7402.9 MCU.17 P3.8 pad.39 pad.56 | length 3164.4
  Bottom Layer w15: MCU.17 2527,3056.32 2634.5,2948.82 2634.5,2624.5 2590,2580 pad.39
  Bottom Layer w20: P3.8 MCU.17 ; pad.56 3980,2580 4040,2640 5220,2640 5550,2970 5550,3200 5610,3260 7402.9 7402.8
NWR: 7402.12 MCU.16 P3.7 pad.40 pad.51 pad.57 pad.59 RAM.27 | length 4566.3
  Bottom Layer w15: MCU.16 2669.5,3017.5 2669.5,2569.5 2625,2525 pad.40
  Bottom Layer w20: P3.7 MCU.16 ; pad.57 3990,2525 4055,2590 pad.59 5240,2590 5610,2960 7402.12 ; pad.51 4590,3280 4602,3292 4602,4387 4775,4560 RAM.27
P1.0: MCU.1 P1.1 | length 300
  Bottom Layer w20: P1.1 MCU.1
P1.1: MCU.2 P1.2 | length 300
  Bottom Layer w20: P1.2 MCU.2
P1.2: MCU.3 P1.3 | length 300
  Bottom Layer w20: P1.3 MCU.3
P1.3: MCU.4 P1.4 | length 300
  Bottom Layer w20: P1.4 MCU.4
P1.4: MCU.5 P1.5 | length 300
  Bottom Layer w20: P1.5 MCU.5
P1.5: MCU.6 P1.6 | length 300
  Bottom Layer w20: P1.6 MCU.6
P1.6: MCU.7 P1.7 | length 300
  Bottom Layer w20: P1.7 MCU.7
P1.7: MCU.8 P1.8 | length 300
  Bottom Layer w20: P1.8 MCU.8
P3.2: MCU.12 P3.3 | length 300
  Bottom Layer w20: P3.3 MCU.12
P3.3: MCU.13 P3.4 | length 300
  Bottom Layer w20: P3.4 MCU.13
P3.4: MCU.14 P3.5 | length 300
  Bottom Layer w20: P3.5 MCU.14
P3.5: MCU.15 P3.6 | length 300
  Bottom Layer w20: P3.6 MCU.15
PSEN: 7402.3 7402.4 | length 100
  Bottom Layer w20: 7402.3 7402.4
RAM_OE: 7402.1 LED.2 | length 4590.3
  Bottom Layer w20: LED.2 5585,2410 5505,2490 4614.68,2490 4567.18,2442.5 4127.5,2442.5 4080,2395 3790,2395 3760,2365 3760,2325.32 3790.32,2295 4155,2295 4222.5,2362.5 4600.31,2362.5 4647.81,2410 5445,2410 5545,2310 5715,2310 5805,2400 5805,2635 7402.1
RAM_OE1: LED.3 pad.53 pad.63 RAM.22 | length 2366.3
  Bottom Layer w20: pad.63@4720,2330 4730,2320 5421.86,2320 5511.86,2230 5815,2230 5930,2345 LED.3 ; pad.53 4720,3265 4695,3290 4695,3983 4772,4060 RAM.22
RD: 7402.2 7402.10 pad.60 pad.61 | length 395.3
  Bottom Layer w20: 7402.10 5655,3160 pad.60@5785,3290 ; pad.61@5785,2960 5795,2960 5895,2860 7402.2
RS: Crs.2 MCU.9 Rrs.2 SW1.2 SW1.4 | length 1742.5
  Bottom Layer w20: Crs.2 1892,3460 1977,3545 Rrs.2 1977,3855 ; SW1.2 SW1.4 1882,3950 1972,3860 MCU.9
RXD: CTL.3 MCU.10 P3.1 | length 3216.1
  Bottom Layer w15: MCU.10 2740,3547 2740,3322.5 2739.5,3322 2739.5,2510.5 2740,2510 2660,2430
  Bottom Layer w20: CTL.3 1877,2950 1830,2903 1830,2626.57 2026.57,2430 2660,2430 ; P3.1 MCU.10
TXD: CTL.4 MCU.11 P3.2 | length 2982.3
  Bottom Layer w15: MCU.11 2705,3482 2705,3336.99 2704.5,3336.49 2704.5,2539.5 2640,2475
  Bottom Layer w20: CTL.4 1977,2985 1875,2883 1875,2638.14 2038.14,2475 2640,2475 ; P3.2 MCU.11
XTAL1: Cxtal1.2 MCU.18 Y?.2 | length 637.8
  Bottom Layer w20: Cxtal1.2 2027,2760 Y?.2 2227,2960 MCU.18
XTAL2: CTL.5 Cxtal2.2 MCU.19 Y?.1 | length 1908.2
  Bottom Layer w15: 2385,2520 2386.96,2520 2599.5,2732.54 2599.5,2787.5 MCU.19
  Bottom Layer w20: CTL.5 2077,3020 1915,2858 1915,2654.71 2049.71,2520 2385,2520 ; Y?.1 MCU.19 ; Cxtal2.2 2427,2855
pads on no net: DS0.3 DS0.5 DS1.3 DS1.5 DS2.3 DS2.5 DS3.3 DS3.5 RAM.1
copper on no net: | length 22740
  Bottom Layer w20: 600,2130 600,5130 2330,5130 8215,5130 8970,5130 8970,2130 6390,2130 600,2130

## Polygon pours and split planes (outlines as drawn)
GND on Bottom Layer "GND_L02_P004" (solid, pour order 4): 600,5130 8960,5130 8970,5130 8970,5015 8970,2130 8905,2130 600,2130 600,2310 600,5130

## Keep-outs
Keep-Out Layer:
  lines w20: 600,2130 600,5130 8970,5130 8970,2130 600,2130

## Silkscreen, mask and mechanical layers (free items; w line width, h text height)
Top Overlay:
  lines w20: 600,2130 600,5130 8970,5130 8970,2130 600,2130
  text "89S52" at 2635,4760 h60
  text "10K" at 5150,4755 h60
  text "POWER" at 1075,4705 h60
  text "12VDC" at 645,4565 h60
  text "RESET" at 1645,4560 h60
  text "nCS0" at 4925,3430 h60
  text "nCS1" at 4925,3340 h60
  text "nCS2" at 4925,3240 h60
  text "XTAL2" at 2110,3235 h60 r90
  text "nCS3" at 4925,3145 h60
  text "nCS4" at 4925,3045 h60
  text "nCS5" at 4925,2935 h60
  text "RXD" at 1900,2925 h60 r90
  text "TXD" at 2005,2925 h60 r90
  text "ALE" at 1795,2920 h60 r90
  text "nCS6" at 4925,2835 h60
  text "nPSEN" at 1705,2800 h60 r90
  text "nCS7" at 4925,2730 h60
  text "12MHz" at 2095,2540 h60
  text "LED" at 5370,2485 h60
  text "GND" at 6705,2375 h60
  text "RAM" at 5365,2365 h60

## Text inside footprints (layer, text, board x,y; h text height)
SD?: Top Overlay "1" at 5625,4612 h20 r270